# EAGLE board schema (EAGLE 9.2.2)
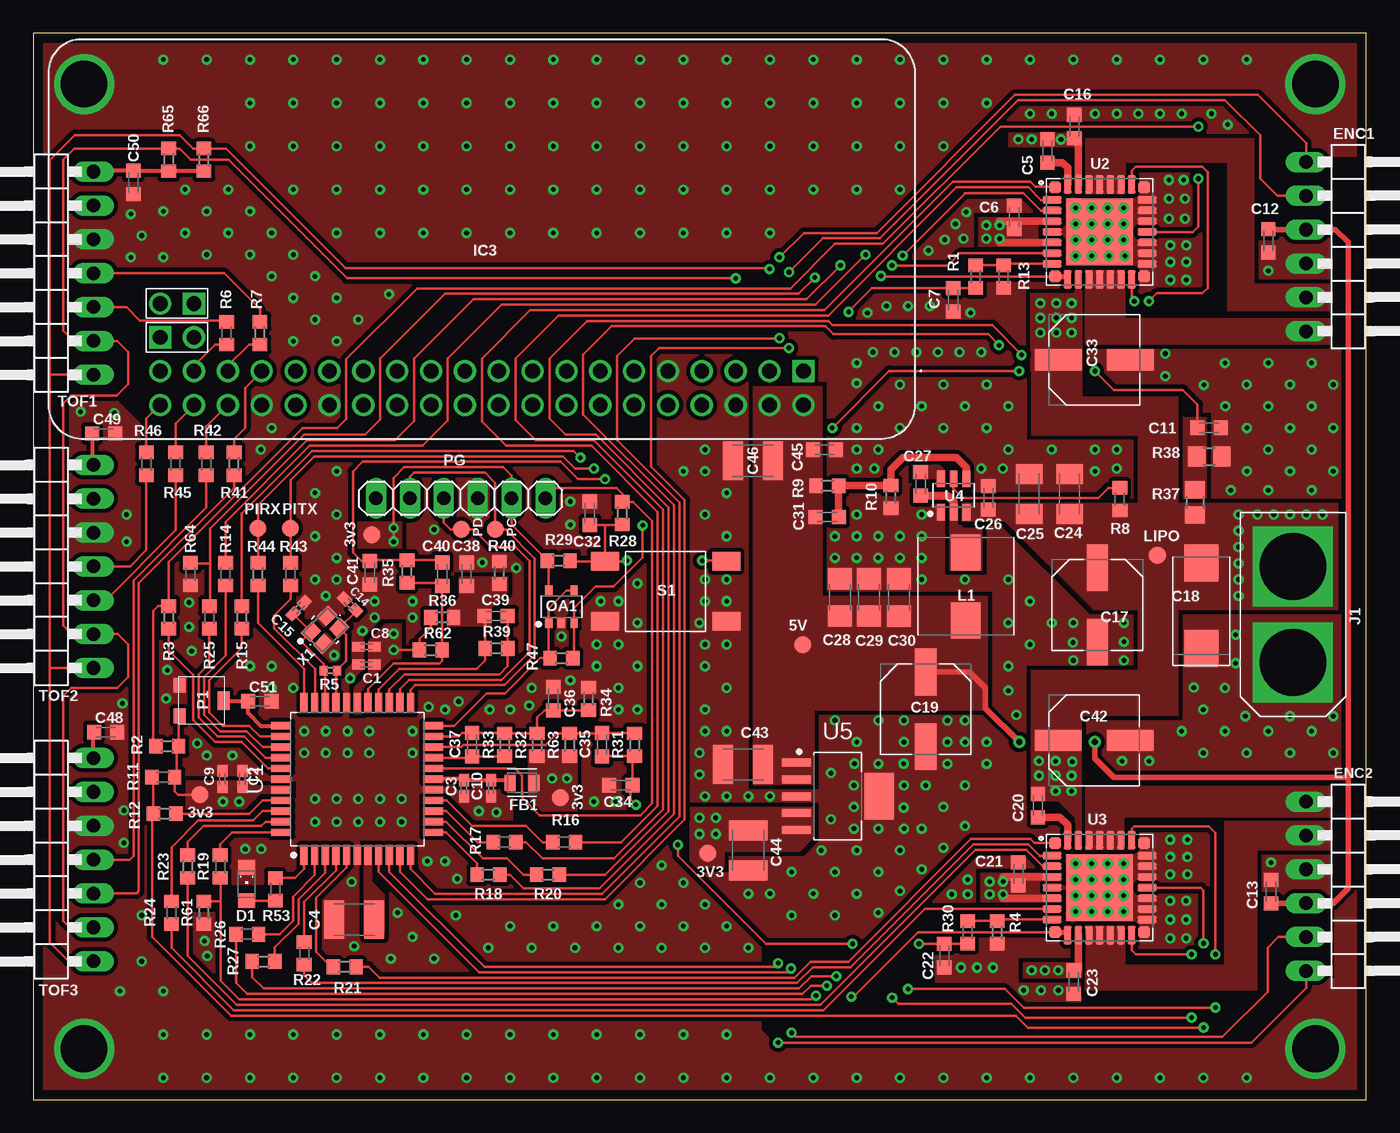
[diagram p0: board, top side]
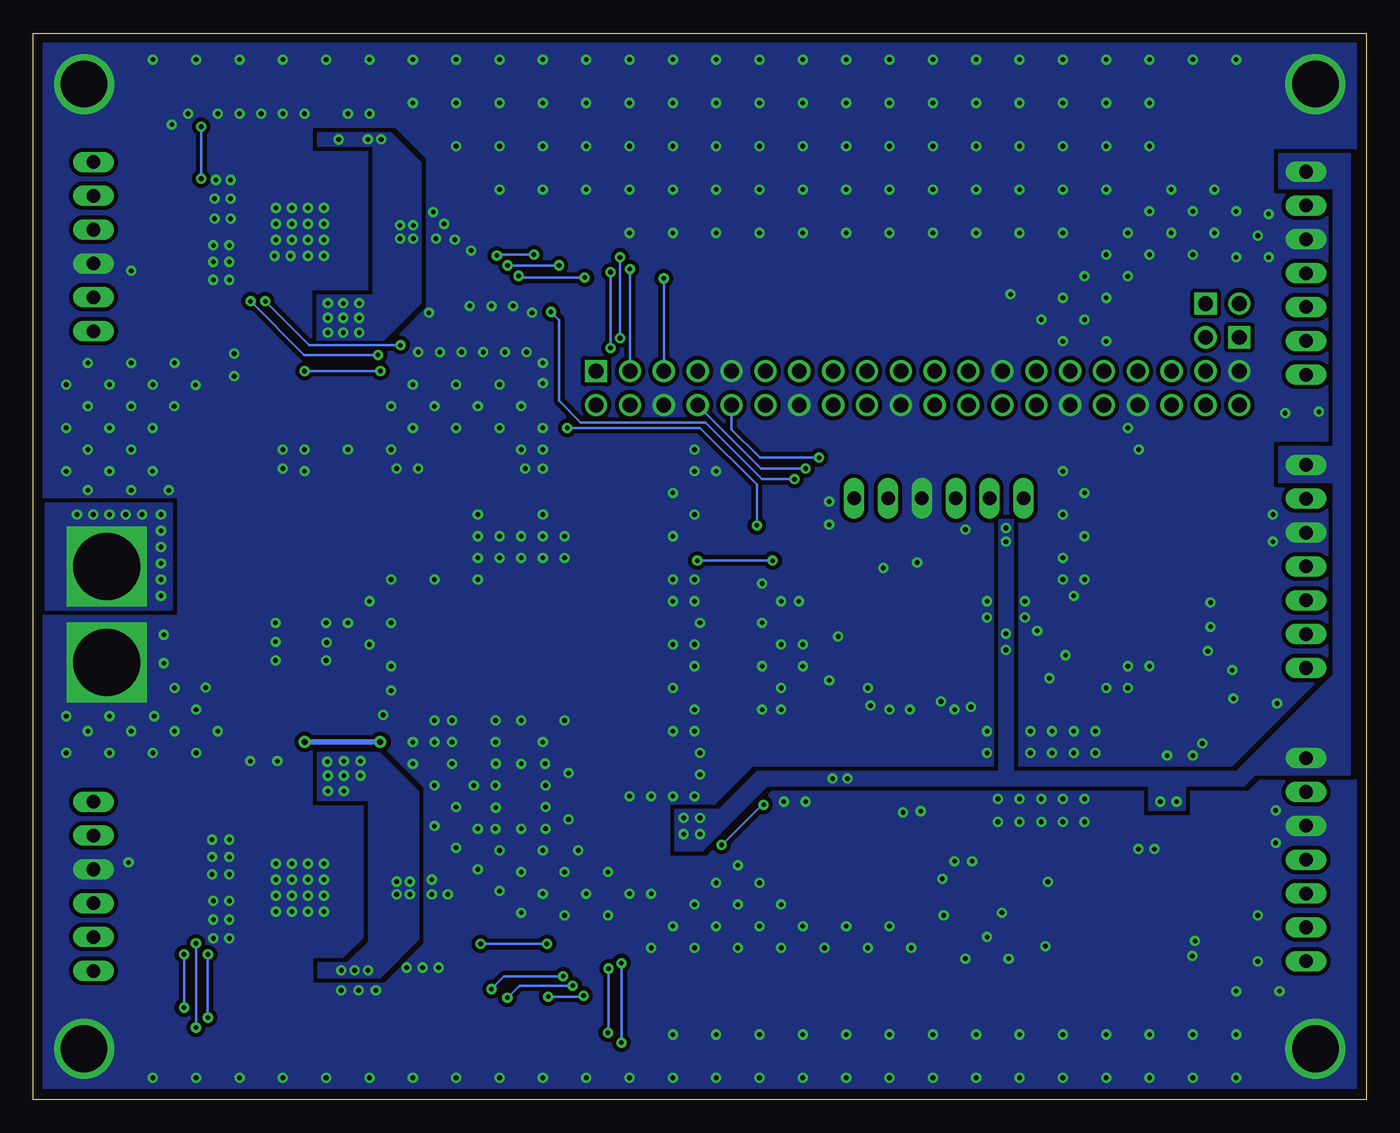
[diagram p1: board, bottom side, seen from below]

Size 100 x 80 mm. Coordinates in mm from the lower left corner, seen from the top.
Outline: 0,0 100,0 100,80 0,80 0,0
Copper layers (1*16): Top 0.0356mm / dielectric 1.5011mm / Bottom 0.0356mm
Design rules "InGear *": minimum track width 8mil, minimum drill 0.3mm, track to track 8mil, track to pad 8mil, pad to pad 8mil, via to via 8mil, smd to smd 8mil, copper to edge 15mil, drill to drill 15mil, minimum pad ring 8mil, minimum via ring 8mil, stop-mask expansion 4mil, vias tented up to drill 18mil, thermal gap 8mil

## Footprints (pad centres in the part's own frame; a part is rotated, then mirrored left to right if it is on the bottom)
B1,27 = smd 1.27 x 1.27: TP 0,0
C0402K = smd 0.925 x 0.74: 1 -0.6,0; 2 0.6,0
C1210K = smd 1.5 x 2.9: 1 -1.5,0; 2 1.5,0
C0603K = smd 1.05 x 1.08: 1 -0.875,0; 2 0.875,0
CAPMP7141X430 = smd 2.77 x 2.55: 1 -3.22,0; 2 3.22,0
CAPAE660X770 = smd 3.5 x 1.6: 1 -2.8,0; 2 2.8,0
C1206K = smd 1.5 x 2: 1 -1.5,0; 2 1.5,0
C1206 = smd 1.6 x 1.8: 1 -1.4,0; 2 1.4,0
CAPAE660X800 = smd 3.512 x 1.579: 1 -2.7,0; 2 2.7,0
LEDC2012X80 = smd 1.1 x 1.25: 1 -1.25,0; 2 1.25,0
1X06/90 = drill 1.016 long: 1 -6.35,-3.81; 2 -3.81,-3.81; 3 -1.27,-3.81; 4 1.27,-3.81; 5 3.81,-3.81; 6 6.35,-3.81
BEADC2012X105 = smd 0.8 x 1.2: 1 -0.9,0; 2 0.9,0
PI_0_W = drill 1.11 pad 1.665 square: 1 -23.885,9.92; 41 24.375,7.38; 43 21.835,4.84 | drill 1.11 pad 1.665: 2 -23.885,12.46; 3 -21.345,9.92; 4 -21.345,12.46; 5 -18.805,9.92; 6 -18.805,12.46; 7 -16.265,9.92; 8 -16.265,12.46; 9 -13.725,9.92; 10 -13.725,12.46; 11 -11.185,9.92; 12 -11.185,12.46; 13 -8.645,9.92; 14 -8.645,12.46; 15 -6.105,9.92; 16 -6.105,12.46; 17 -3.565,9.92; 18 -3.565,12.46; 19 -1.025,9.92; 20 -1.025,12.46; 21 1.515,9.92; 22 1.515,12.46; 23 4.055,9.92; 24 4.055,12.46; 25 6.595,9.92; 26 6.595,12.46; 27 9.135,9.92; 28 9.135,12.46; 29 11.675,9.92; 30 11.675,12.46; 31 14.215,9.92; 32 14.215,12.46; 33 16.755,9.92; 34 16.755,12.46; 35 19.295,9.92; 36 19.295,12.46; 37 21.835,9.92; 38 21.835,12.46; 39 24.375,9.92; 40 24.375,12.46; 42 21.835,7.38; 44 24.375,4.84
XT60 = drill 5 square: 1 -3.6,0; 2 3.6,0
INDDFN700X690X400-2 = smd 2.7 x 2.2: 1 -2.55,0; 2 2.55,0
SOT95P285X115-5 = smd 0.8 x 0.55: 1 -1.2,0.95; 2 -1.2,0; 3 -1.2,-0.95; 4 1.2,-0.95; 5 1.2,0.95
PVG3A = smd 1.1 x 0.9: 1 1.15,-1.65; 3 -1.15,-1.65 | smd 1.4 x 0.9: 2 0,1.65
1X06 = drill 1.016 long: 1 -6.35,0; 2 -3.81,0; 3 -1.27,0; 4 1.27,0; 5 3.81,0; 6 6.35,0
R0603 = smd 1 x 1.1: 1 -0.85,0; 2 0.85,0
R0402 = smd 0.6 x 0.7: 1 -0.5,0; 2 0.5,0
R0805 = smd 1.3 x 1.5: 1 -0.95,0; 2 0.95,0
BUTON_SMD = smd 2.1 x 1.4: 1 -4.55,2.25; 2 4.55,2.25; 3 -4.55,-2.25; 4 4.55,-2.25
1X07/90 = drill 1.016 long: 1 -7.62,-3.81; 2 -5.08,-3.81; 3 -2.54,-3.81; 4 0,-3.81; 5 2.54,-3.81; 6 5.08,-3.81; 7 7.62,-3.81
QFP80P1200X1200X120-44 = smd 1.5 x 0.55: 1 -5.7,4; 2 -5.7,3.2; 3 -5.7,2.4; 4 -5.7,1.6; 5 -5.7,0.8; 6 -5.7,0; 7 -5.7,-0.8; 8 -5.7,-1.6; 9 -5.7,-2.4; 10 -5.7,-3.2; 11 -5.7,-4; 23 5.7,-4; 24 5.7,-3.2; 25 5.7,-2.4; 26 5.7,-1.6; 27 5.7,-0.8; 28 5.7,0; 29 5.7,0.8; 30 5.7,1.6; 31 5.7,2.4; 32 5.7,3.2; 33 5.7,4 | smd 0.55 x 1.5: 12 -4,-5.7; 13 -3.2,-5.7; 14 -2.4,-5.7; 15 -1.6,-5.7; 16 -0.8,-5.7; 17 0,-5.7; 18 0.8,-5.7; 19 1.6,-5.7; 20 2.4,-5.7; 21 3.2,-5.7; 22 4,-5.7; 34 4,5.7; 35 3.2,5.7; 36 2.4,5.7; 37 1.6,5.7; 38 0.8,5.7; 39 0,5.7; 40 -0.8,5.7; 41 -1.6,5.7; 42 -2.4,5.7; 43 -3.2,5.7; 44 -4,5.7
QFN80P800X800X220-33N = smd 0.9 x 0.9: 1 -3.35,3.35; 9 -3.35,-3.35; 17 3.35,-3.35; 25 3.35,3.35 | smd 1.41 x 0.56: 2 -3.56,2.4; 3 -3.56,1.6; 4 -3.56,0.8; 5 -3.56,0; 6 -3.56,-0.8; 7 -3.56,-1.6; 8 -3.56,-2.4; 18 3.56,-2.4; 19 3.56,-1.6; 20 3.56,-0.8; 21 3.56,0; 22 3.56,0.8; 23 3.56,1.6; 24 3.56,2.4 | smd 0.56 x 1.41: 10 -2.4,-3.56; 11 -1.6,-3.56; 12 -0.8,-3.56; 13 0,-3.56; 14 0.8,-3.56; 15 1.6,-3.56; 16 2.4,-3.56; 26 2.4,3.56; 27 1.6,3.56; 28 0.8,3.56; 29 0,3.56; 30 -0.8,3.56; 31 -1.6,3.56; 32 -2.4,3.56 | smd 5 x 5: 33 0,0
SOT95P280X110-6 = smd 1.25 x 0.589: 1 -1.256,0.95; 2 -1.256,0; 3 -1.256,-0.95; 4 1.256,-0.95; 5 1.256,0; 6 1.256,0.95
SOT127P706X180-6 = smd 2.2 x 0.6: 1 -3.1,2.54; 2 -3.1,1.27; 3 -3.1,0; 4 -3.1,-1.27; 5 -3.1,-2.54 | smd 2.2 x 3.5: 6 3.1,0
HOLE_3.5MM = drill 3.5: P$1 0,0
OSCCC250X200X60 = smd 1.2 x 1: 1 -0.85,0.65; 2 0.85,0.65; 3 0.85,-0.65; 4 -0.85,-0.65

## Placement (x,y rotation side)
3V3  TPB1,27  [B1,27]  50.6,18.49 0 top
3V3@2  TPB1,27  [B1,27]  39.52,22.66 0 top
3V3@3  TPB1,27  [B1,27]  25.4,42.37 0 top
3V3@4  TPB1,27  [B1,27]  12.5,22.86 0 top
5V  TPB1,27  [B1,27]  57.71,34.14 0 top
C1  0.1uF  [C0402K]  25,32.64 0 top
C2  0.1uF  [C0402K]  15.7,24.05 90 top
C3  0.1uF  [C0402K]  32.31,23.37 90 top
C4  10uF  [C1210K]  24.08,13.5 0 top
C5  33nF  [C0603K]  76.08,71.19 90 top
C6  0.1uF  [C0603K]  73.6,66.2 270 top
C7  0.47uF  [C0603K]  69,60 270 top
C8  1nF  [C0402K]  25,33.98 0 top
C9  1nF  [C0402K]  14.2,24.05 90 top
C10  1nF  [C0402K]  34.34,23.37 90 top
C11  0.1uF  [C0603K]  88.22,50.4 0 top
C12  0.1uF  [C0603K]  92.66,64.41 90 top
C13  0.1uF  [C0603K]  92.87,15.61 270 top
C14  8pF  [C0402K]  23.78,37.13 315 top
C15  8pF  [C0402K]  19.91,36.86 45 top
C16  1uF  [C0603K]  78.1,73 90 top
C17  100uF  [CAPMP7141X430]  87.63,37.05 90 top
C18  100uF  [CAPAE660X770]  79.83,37.11 270 top
C19  100uF  [CAPAE660X770]  66.94,29.28 270 top
C20  33nF  [C0603K]  75.37,22.05 90 top
C21  0.1uF  [C0603K]  73.9,16.93 270 top
C22  0.47uF  [C0603K]  68.35,10.8 270 top
C23  1uF  [C0603K]  78.04,8.82 270 top
C24  10uF  [C1206K]  77.74,45.45 90 top
C25  10uF  [C1206K]  74.7,45.45 90 top
C26  0.1uF  [C0603K]  71.65,45.15 90 top
C27  0.1uF  [C0603K]  66.58,46.19 90 top
C28  22uF  [C1206]  60.53,37.69 90 top
C29  22uF  [C1206]  62.71,37.68 90 top
C30  DNP  [C1206]  64.95,37.67 90 top
C31  DNP  [C0603K]  59.56,43.71 0 top
C32  1nF  [C0603K]  41.76,43.99 90 top
C33  100uF  [CAPAE660X800]  79.6,55.5 0 top
C34  DNP  [C0603K]  44.09,23.58 180 top
C35  DNP  [C0603K]  42.67,26.62 90 top
C36  DNP  [C0603K]  39.01,30.07 90 top
C37  100pF  [C0603K]  32.92,26.62 90 top
C38  DNP  [C0603K]  32.51,39.42 90 top
C39  100pF  [C0603K]  34.72,36.28 180 top
C40  DNP  [C0603K]  30.68,39.42 270 top
C41  DNP  [C0603K]  25.26,39.52 270 top
C42  100uF  [CAPAE660X800]  79.59,26.94 0 top
C43  10uF  [C1210K]  53.25,25.15 0 top
C44  10uF  [C1210K]  53.64,18.71 270 top
C45  0.1uF  [C0603K]  59.36,48.75 180 top
C46  10uF  [C1210K]  53.99,47.93 180 top
C48  0.1uF  [C0603K]  5.44,27.57 0 top
C49  0.1uF  [C0603K]  5.28,49.97 0 top
C50  0.1uF  [C0603K]  7.5,68.8 270 top
C51  0.1uF  [C0603K]  16.99,29.88 0 top
D1  [LEDC2012X80]  16,16.18 270 top
ENC1  2283  [1X06/90]  99.3,64 270 top
ENC2  2283  [1X06/90]  99.3,16 270 top
FB1  [BEADC2012X105]  36.67,23.77 180 top
IC3  [PI_0_W]  33.89,64.57 180 top
J1  [XT60]  94.5,36.4 270 top
L1  3.3uH  [INDDFN700X690X400-2]  69.95,38.51 270 top
LIPO  TPB1,27  [B1,27]  84.33,40.84 0 top
OA1  [SOT95P285X115-5]  39.62,36.98 90 top
P1  [PVG3A]  12.62,29.93 270 top
PC  TPB1,27  [B1,27]  34.65,42.77 0 top
PD  TPB1,27  [B1,27]  32.11,42.77 0 top
PG  PICkit3  [1X06]  32.07,45.11 180 top
PIRX  TPB1,27  [B1,27]  16.87,42.88 0 top
PITX  TPB1,27  [B1,27]  19.3,42.88 0 top
R1  1k  [R0603]  70.7,61.75 90 top
R2  10k  [R0603]  10.06,26.52 0 top
R3  330  [R0603]  10.16,36.17 90 top
R4  220  [R0603]  72.3,12.55 90 top
R5  DNP  [R0402]  22.29,32.18 180 top
R6  100  [R0603]  14.5,57.5 90 top
R7  100  [R0603]  17,57.5 90 top
R8  10k  [R0603]  81.51,45.05 270 top
R9  54k9  [R0603]  59.57,46.05 180 top
R10  10k  [R0603]  64.34,45.22 90 top
R11  10k  [R0603]  9.75,24.18 0 top
R12  330  [R0603]  9.86,21.44 180 top
R13  220  [R0603]  72.8,61.75 90 top
R14  330  [R0603]  14.43,39.42 90 top
R15  330  [R0603]  15.65,36.17 270 top
R16  330  [R0603]  39.83,19.3 180 top
R17  330  [R0603]  35.36,19.3 180 top
R18  330  [R0603]  34.14,16.87 0 top
R19  330  [R0603]  14.02,17.48 270 top
R20  330  [R0603]  38.61,16.87 180 top
R21  330  [R0603]  23.37,9.96 0 top
R22  330  [R0603]  20.32,10.97 270 top
R23  330  [R0603]  11.58,17.48 270 top
R24  330  [R0603]  10.36,14.02 270 top
R25  330  [R0603]  13.21,36.17 90 top
R26  330  [R0603]  16.05,12.4 180 top
R27  330  [R0603]  17.27,10.36 0 top
R28  100  [R0603]  44.2,43.99 90 top
R29  10k  [R0603]  39.42,40.44 0 top
R30  1k  [R0603]  70.1,12.55 90 top
R31  1k  [R0603]  45.11,26.62 90 top
R32  DNP  [R0603]  37.8,26.62 90 top
R33  4k3  [R0603]  35.36,26.62 270 top
R34  4k3  [R0603]  41.66,30.07 270 top
R35  1k  [R0603]  28.04,39.62 270 top
R36  DNP  [R0603]  30.68,36.17 0 top
R37  2M  [R0805]  87.16,44.81 270 top
R38  1M  [R0805]  88.22,48.26 0 top
R39  4k3  [R0603]  34.75,33.85 0 top
R40  4k3  [R0603]  34.95,39.52 270 top
R41  100  [R0603]  15.07,47.7 270 top
R42  100  [R0603]  12.97,47.7 270 top
R43  330  [R0603]  19.3,39.42 90 top
R44  330  [R0603]  16.87,39.42 90 top
R45  100  [R0603]  10.68,47.7 270 top
R46  100  [R0603]  8.48,47.7 270 top
R47  DNP  [R0603]  39.62,33.12 0 top
R53  240  [R0603]  18.16,15.78 90 top
R61  DNP  [R0603]  12.8,14.02 90 top
R62  DNP  [R0603]  29.82,33.73 180 top
R63  DNP  [R0603]  40.23,26.62 270 top
R64  DNP  [R0603]  11.79,39.42 90 top
R65  4k7  [R0603]  10.16,70.51 270 top
R66  4k7  [R0603]  12.8,70.51 270 top
S1  [BUTON_SMD]  47.44,38.13 180 top
TOF1  VL53L0X  [1X07/90]  0.7,62 90 top
TOF2  VL53L0X  [1X07/90]  0.7,40 90 top
TOF3  VL53L0X  [1X07/90]  0.7,18 90 top
U1  DSPIC33EP128GM304TFQP44_WITH3D  [QFP80P1200X1200X120-44]  24.3,24.05 90 top
U2  [QFN80P800X800X220-33N]  80,65.1 0 top
U3  [QFN80P800X800X220-33N]  80,15.9 0 top
U4  [SOT95P280X110-6]  69.05,45.33 90 top
U5  TL1963A-33DCQRDCQ  [SOT127P706X180-6]  60.35,22.76 0 top
U$1  MOUNTING_HOLE  [HOLE_3.5MM]  3.81,76.19 0 top
U$2  MOUNTING_HOLE  [HOLE_3.5MM]  3.81,3.81 0 top
U$3  MOUNTING_HOLE  [HOLE_3.5MM]  96.19,3.81 0 top
U$4  MOUNTING_HOLE  [HOLE_3.5MM]  96.19,76.19 0 top
X1  [OSCCC250X200X60]  21.9,35.24 45 top

## Library data of the parts
3V3 3V3@2-3V3@4 5V LIPO PC PD PIRX PITX = testpad
C1-C3 = rcl; MANUFACTURER_PART_NUMBER: CC0402KRX7R7BB104; SPICEPREFIX: C
C4 C46 = rcl; MANUFACTURER_PART_NUMBER: TAJB106K016TNJ; SPICEPREFIX: C
C5 C20 = rcl; MANUFACTURER_PART_NUMBER: CC0603KRX7R9BB333; SPICEPREFIX: C
C6 C11-C13 C21 C26 C27 C45 C48-C51 = rcl; MANUFACTURER_PART_NUMBER: CC0603KRX7R9BB104; SPICEPREFIX: C
C7 C22 = rcl; MANUFACTURER_PART_NUMBER: TMK107B7474KA-TR; SPICEPREFIX: C
C8-C10 = rcl; MANUFACTURER_PART_NUMBER: AC0402KRX7R7BB102; SPICEPREFIX: C
C14 C15 = rcl; MANUFACTURER_PART_NUMBER: GCM1555C1H8R0DA16D; SPICEPREFIX: C
C16 C23 = rcl; MANUFACTURER_PART_NUMBER: UMK107AB7105KA-T; SPICEPREFIX: C
C17 = licenta; DATASHEET_URL: https://ro.mouser.com/datasheet/2/212/KEM_T2005_T491-1093550.pdf; MANUFACTURER_NAME: KEMET; MANUFACTURER_PART_NUMBER: T491X107M025AT
C18 C19 = licenta; DATASHEET_URL: https://ro.mouser.com/datasheet/2/445/865080545012-1075142.pdf; MANUFACTURER_NAME: Wurth Electronics; MANUFACTURER_PART_NUMBER: 865080545012
C24 C25 = rcl; MANUFACTURER_PART_NUMBER: GMK316AB7106KL-TR; SPICEPREFIX: C
C28 C29 = rcl; MANUFACTURER_PART_NUMBER: EMK316BB7226ML-T; SPICEPREFIX: C
C30 C31 C34-C36 C38 C40 C41 = rcl; SPICEPREFIX: C
C32 = rcl; MANUFACTURER_PART_NUMBER: 885012206083; SPICEPREFIX: C
C33 C42 = licenta; DATASHEET_URL: https://ro.mouser.com/datasheet/2/315/ABA0000C1221-1280637.pdf; MANUFACTURER_NAME: Panasonic; MANUFACTURER_PART_NUMBER: EEH-ZA1E101XV
C37 C39 = rcl; MANUFACTURER_PART_NUMBER: 885342206001; SPICEPREFIX: C
C43 C44 = rcl; MANUFACTURER_PART_NUMBER: GRM32DR71E106MA12L; SPICEPREFIX: C
D1 = licenta; DATASHEET_URL: https://ro.mouser.com/datasheet/2/239/Lite-On-LTST-C171GKT-1175279.pdf; MANUFACTURER_NAME: Lite-On; MANUFACTURER_PART_NUMBER: LTST-C171GKT
ENC1 ENC2 PG TOF1-TOF3 = pinhead
FB1 = licenta; DATASHEET_URL: https://ro.mouser.com/datasheet/2/400/eads_automotive_power_mpz2012-j_en-1221219.pdf; MANUFACTURER_NAME: TDK; MANUFACTURER_PART_NUMBER: MPZ2012S102JTD25
IC3 = Raspberry_Pi_Zero_W_(v1.3)
J1 = licenta; DATASHEET_URL: -; MANUFACTURER_NAME: SparkFun; MANUFACTURER_PART_NUMBER: PRT-10474
L1 = licenta; DATASHEET_URL: https://ro.mouser.com/datasheet/2/445/744311330-538550.pdf; MANUFACTURER_NAME: Wurth Electronics; MANUFACTURER_PART_NUMBER: 744311330
OA1 = licenta; DATASHEET_URL: https://ro.mouser.com/datasheet/2/115/TLV27x-335372.pdf; MANUFACTURER_NAME: Diodes Incorporated; MANUFACTURER_PART_NUMBER: TLV271CW5-7
P1 = licenta; DATASHEET_URL: https://ro.mouser.com/datasheet/2/54/vg3-1084610.pdf; MANUFACTURER_NAME: Bourns; MANUFACTURER_PART_NUMBER: PVG3A203C01R00
R1 R30 R31 R35 = rcl; MANUFACTURER_PART_NUMBER: ERJ-3RBD102V; SPICEPREFIX: R
R2 R8 R10 R11 R29 = rcl; MANUFACTURER_PART_NUMBER: ERJ-3RBD1002V; SPICEPREFIX: R
R3 R12 R14-R27 R43 R44 = rcl; MANUFACTURER_PART_NUMBER: RC0603FR-07330RL; SPICEPREFIX: R
R4 R13 = rcl; MANUFACTURER_PART_NUMBER: UCR03EVPFLR220; SPICEPREFIX: R
R5 R32 R36 R47 R61-R64 = rcl; SPICEPREFIX: R
R6 R7 R28 R41 R42 R45 R46 = rcl; MANUFACTURER_PART_NUMBER: AC0603FR-13100RL; SPICEPREFIX: R
R9 = rcl; MANUFACTURER_PART_NUMBER: ERJ-PB3B5492V; SPICEPREFIX: R
R33 R34 R39 R40 = rcl; MANUFACTURER_PART_NUMBER: AC0603FR-074K3L; SPICEPREFIX: R
R37 = rcl; MANUFACTURER_PART_NUMBER: ERJ-6RED2003V; SPICEPREFIX: R
R38 = rcl; MANUFACTURER_PART_NUMBER: AC0805FR-13100KL; SPICEPREFIX: R
R53 = rcl; MANUFACTURER_PART_NUMBER: ERJ-3RBD2400V; SPICEPREFIX: R
R65 R66 = rcl; MANUFACTURER_PART_NUMBER: SFR03EZPF4701; SPICEPREFIX: R
S1 = licenta; DATASHEET_URL: https://ro.mouser.com/datasheet/2/140/P090002-267756.pdf; MANUFACTURER_NAME: E-Switch; MANUFACTURER_PART_NUMBER: LL3301NF065QG
U1 = licenta; DATASHEET_URL: http://ww1.microchip.com/downloads/en/DeviceDoc/70000689d.pdf; MANUFACTURER_NAME: Microchip Technology; MANUFACTURER_PART_NUMBER: dsPIC33EP128GM304-E/PT
U2 U3 = licenta; DATASHEET_URL: https://www.nxp.com/docs/en/data-sheet/MC33926.pdf; MANUFACTURER_NAME: NXP / Freescale; MANUFACTURER_PART_NUMBER: MC33926PNB
U4 = licenta; DATASHEET_URL: http://www.ti.com/lit/ds/symlink/tps565201.pdf; MANUFACTURER_NAME: Texas Instruments; MANUFACTURER_PART_NUMBER: TPS565201DDCT
U5 = licenta; DATASHEET_URL: http://www.ti.com/lit/ds/symlink/tl1963a.pdf; MANUFACTURER_NAME: Texas Instruments; MANUFACTURER_PART_NUMBER: TL1963A-33DCQR
U$1-U$4 = licenta
X1 = licenta; DATASHEET_URL: https://ro.mouser.com/datasheet/2/122/ECX-2236-15751.pdf; MANUFACTURER_NAME: ECS; MANUFACTURER_PART_NUMBER: ECS-120-10-36-AGY-TR

## Nets
3V3: 3V3.TP 3V3@2.TP 3V3@3.TP 3V3@4.TP C1.2 C2.1 C8.2 C9.1 C44.1 C48.1 C49.1 C50.1 FB1.1 OA1.5 P1.1 PG.2 R2.2 R11.2 R29.1 R32.1 R36.1 R62.2 R63.2 R65.2 R66.2 TOF1.7 TOF2.7 TOF3.7 U1.28 U1.40 U5.4 U5.5
5V: 5V.TP C12.2 C13.2 C19.1 C28.1 C29.1 C30.1 C31.1 C43.2 C45.2 C46.1 ENC1.3 ENC2.4 IC3.2 IC3.4 L1.2 R9.2 U5.1 U5.2
!MCLR: PG.1 R28.2 U1.18
GND: C1.1 C2.2 C3.1 C4.1 C6.1 C7.2 C8.1 C9.2 C10.1 C11.2 C12.1 C13.1 C14.1 C15.2 C16.2 C17.1 C18.2 C19.2 C21.1 C22.2 C23.2 C24.2 C25.2 C26.2 C28.2 C29.2 C30.2 C32.2 C33.2 C34.2 C36.2 C38.2 C41.2 C42.2 C43.1 C44.2 C45.1 C46.2 C48.2 C49.2 C50.2 C51.2 D1.1 ENC1.4 ENC2.3 IC3.6 IC3.9 IC3.14 IC3.20 IC3.25 IC3.30 IC3.34 IC3.39 J1.2 OA1.2 P1.3 PG.3 R4.1 R10.1 R13.1 R34.1 R38.2 R40.1 R61.1 R64.1 S1.1 S1.2 TOF1.5 TOF2.5 TOF3.5 U1.6 U1.16 U1.29 U1.39 U2.5 U2.17 U2.18 U2.19 U2.20 U2.22 U2.23 U2.24 U2.25 U2.33 U3.5 U3.17 U3.18 U3.19 U3.20 U3.22 U3.23 U3.24 U3.25 U3.33 U4.1 U5.3 U5.6 U$1.P$1 U$2.P$1 U$3.P$1 U$4.P$1 X1.2 X1.4
GPIO1: R7.2 TOF1.4
GPIO2: R46.2 TOF2.4
GPIO3: R42.2 TOF3.4
LIPO: C5.2 C6.2 C16.1 C17.2 C18.1 C20.2 C21.2 C23.1 C24.1 C25.1 C26.1 C33.1 C42.1 J1.1 LIPO.TP R8.2 R37.2 U2.4 U2.6 U2.11 U2.31 U3.4 U3.6 U3.11 U3.31 U4.3
LIPO_ADC: OA1.1 OA1.4 R47.1 U1.22
M1_!D2: R18.1 U1.12
M1_!SF: R3.1 U1.38
M1_D1: R20.2 U1.13
M1_EN: R25.1 U1.37
M1_FB: C7.1 C40.1 C41.1 R1.1 R35.1
M1_IN1: R17.2 U1.14
M1_IN2: R16.2 U1.15
M1_INV: R14.1 U1.36
M1_OUT1: ENC1.6 U2.12 U2.13 U2.14 U2.15
M1_OUT2: ENC1.5 U2.27 U2.28 U2.29 U2.30
M1_QEA: ENC1.2 U1.10
M1_QEB: ENC1.1 U1.11
M1_SLEW: R15.2 U1.35
M2_!D2: R26.1 U1.2
M2_!SF: R12.1 U1.41
M2_D1: R27.2 U1.3
M2_EN: R19.1 U1.44
M2_FB: C22.1 C34.1 C35.1 R30.1 R31.1
M2_IN1: R22.1 U1.4
M2_IN2: R21.1 U1.5
M2_INV: R24.1 U1.42
M2_OUT1: ENC2.2 U3.12 U3.13 U3.14 U3.15
M2_OUT2: ENC2.1 U3.27 U3.28 U3.29 U3.30
M2_QEA: ENC2.5 U1.8
M2_QEB: ENC2.6 U1.9
M2_SLEW: R23.1 U1.43
N$1: R53.2 U1.1
N$2: IC3.33 R41.1
N$3: C27.2 U4.6
N$4: C31.2 R9.1 R10.2 U4.4
N$5: R14.2 U2.7
N$6: R21.2 U3.1
N$7: R8.1 U4.5
N$8: R22.2 U3.2
N$9: C4.2 U1.7
N$10: C27.1 L1.1 U4.2
N$11: R23.2 U3.3
N$12: R24.2 U3.7
N$13: R26.2 U3.16
N$14: R27.1 U3.26
N$15: R20.1 U2.26
N$16: R16.1 U2.1
N$17: R17.1 U2.2
N$18: R15.1 U2.3
N$19: R18.2 U2.16
N$20: R11.1 R12.2 U3.21
N$21: IC3.35 R7.1
N$22: R2.1 R3.2 U2.21
N$23: R25.2 R64.2 U2.9 U2.10
N$24: R4.2 R30.2 U3.8
N$25: C5.1 U2.32
N$26: R19.2 R61.2 U3.9 U3.10
N$27: IC3.36 R42.1
N$28: IC3.37 R6.1
N$29: IC3.38 R45.1
N$30: IC3.40 R46.1
N$31: R1.2 R13.2 U2.8
N$32: C11.1 OA1.3 R37.1 R38.1 R47.2
N$33: IC3.8 PITX.TP R43.2
N$34: IC3.10 PIRX.TP R44.2
N$36: D1.2 R53.1
N$41: C3.2 C10.2 FB1.2 U1.17
N$50: C20.1 U3.32
OA2IN+: C35.2 R31.2 R63.1 U1.20
OA2IN-: C36.1 C37.2 R32.2 R33.1 R34.2 U1.21
OA2OUT: C37.1 R33.2 U1.19
OA3IN+: C40.2 R35.2 R62.1 U1.27
OA3IN-: C38.1 C39.2 R36.2 R39.1 R40.2 U1.26
OA3OUT: C39.1 R39.2 U1.25
OSC1: C14.2 R5.1 U1.30 X1.3
OSC2: C15.1 R5.2 U1.31 X1.1
PGEC: PC.TP PG.5 U1.23
PGED: PD.TP PG.4 U1.24
PI_RX: R44.1 U1.33
PI_TX: R43.1 U1.32
POT_ADC: C51.1 P1.2 U1.34
RESET: C32.1 R28.1 R29.2 S1.3 S1.4
SCL: IC3.5 R65.1 TOF1.2 TOF2.2 TOF3.2
SDA: IC3.3 R66.1 TOF1.1 TOF2.1 TOF3.1
XSHUT1: R6.2 TOF1.3
XSHUT2: R45.2 TOF2.3
XSHUT3: R41.2 TOF3.3

## Tracks (layer width: path | path; a pad name or v marks a point on that pad's centre or on a via)
3V3  (via drill 0.35 pad 0.7)
  Top 0.203: P1.1 10.91,28.72 R2.2 10.76,26.36 10.76,24.33 R11.2 10.6,23.13 10.87,22.86 3V3@4.TP | R36.1 29.83,35.42 28.97,34.55 R62.2 | v27.03,33.73 R62.2 | R62.2 | OA1.5 38.67,40.33 R29.1 35.88,43.13 PG.2 35.88,46.83 35.26,47.45 27.82,47.45 27.02,46.65 v27.02,42.88 v27.03,42.88 v27.03,41.86
  Top 0.305: R66.2 R65.2 10.14,69.68 C50.1 4.57,69.68 TOF1.7 | C49.1 4.4,47.73 TOF2.7 | TOF3.7 4.51,27.52 C48.1
  other vias: 51.21,21.13 51.21,19.91 49.99,19.91 49.99,21.13 27.03,34.95 14.22,22.35 15.44,22.35 40.03,24.08 38.91,24.08
  pour Top (isolate 0.305, no thermals): 49.38,18.71 49.38,21.86 58.45,21.86 58.45,19.73 57.43,18.71
  pour Bottom (no thermals): 51.82,18.69 51.82,21.74 48.56,21.74 45.72,24.59 9.75,24.59 2.44,31.9 2.44,70.92 1.22,70.92 1.22,31.5 9.14,23.57 44.91,23.57 49.78,18.69
  pour Top (no thermals): 19.37,22.97 19.37,23.52 16.66,23.52 16.27,23.91 11.44,23.91 11.44,21.76 15.86,21.76 17.07,22.97
  pour Bottom (no thermals): 1.22,70.92 6.5,70.92 6.5,68.38 1.22,68.38
  pour Bottom (no thermals): 1.22,46.33 6.5,46.33 6.5,48.97 1.22,48.97
  pour Top (no thermals): 24.03,28.98 24.58,28.98 24.58,30.67 26.88,32.97 27.64,32.97 27.64,35.67 26.43,35.67 25.13,34.38 25.13,31.96 24.03,30.86
  pour Bottom: 26.52,43.48 27.53,43.48 27.53,23.57 26.52,23.57
  pour Bottom: 13.61,24.59 16.26,24.59 16.26,21.74 13.61,21.74
  pour Top (no thermals): 37.17,26.27 40.79,26.27 40.79,21.54 38.2,21.54 37.17,22.57
  pour Bottom (no thermals): 1.22,24.38 1.22,32.31 9.14,24.38
  pour Top (no thermals): 24.38,43.38 27.64,43.38 27.64,41.35 24.38,41.35
  pour Top (no thermals): 49.38,20.12 51.71,20.12 51.71,17.48 49.38,17.48
5V  (via drill 0.45 pad 0.9)
  Top 0.406: C13.2 ENC2.4 97.53,14.73 98.65,15.85 98.65,24.18 | C12.2 92.68,65.27 ENC1.3 97.7,65.27 98.65,64.32 98.65,24.18 | C19.1 70.23,32.08 71.42,30.89 71.42,29.36 v73.97,26.82 | v79.65,26.82 79.65,25.6 81.08,24.18 98.65,24.18
  Bottom 0.406: v73.97,26.82 v79.65,26.82
  pour Top (no thermals): 54.05,53.44 59.13,53.44 59.13,37.69 71.53,37.69 71.53,29.26 58.52,29.26 58.52,23.67 54.05,23.67
!MCLR
  Top 0.203: PG.1 39.17,45.87 43.76,45.87 44.2,45.42 R28.2 44.98,44.84 46.43,43.39 46.43,22.23 45.54,21.34 38,21.34 36.68,22.66 36.68,24.28 36.48,24.48 36.48,24.5 36.13,24.84 U1.18
CUTOUT_POLIGON
  cutout Top: 30.07,59.13 31.5,59.13 28.24,55.88 28.24,52.83 26.31,52.83 26.31,55.37
  cutout Top: 33.93,53.85 35.76,53.85 35.76,50.8 37.19,49.38 35.76,49.38 33.93,51.21
  cutout Top: 41.66,53.85 43.48,53.85 43.48,49.78 41.66,51.61
  cutout Top: 14.43,16.05 19.1,16.05 19.1,13.61 14.43,13.61
  cutout Top: 36.27,22.86 36.27,20.93 36.07,20.93 36.07,22.86
  cutout Top: 8.08,50.75 6.35,52.48 8.43,54.56 8.43,55.98 10.46,55.98 10.46,53.14
  cutout Top: 54.66,11.28 54.66,5.28 55.27,4.67 55.68,4.67 55.68,11.28
  cutout Top: 97.54,18.49 97.54,9.14 97.33,9.14 97.33,18.49
  cutout Top: 99.16,70.71 99.16,56.39 97.33,56.39 97.33,70.71
  cutout Top: 67.56,10.97 67.56,8.53 67.26,8.53 67.26,10.97
  cutout Top: 78.65,7.99 78.65,7.11 79.04,7.11 79.04,7.99
GND  (via drill 0.35, 0.35 pad 0.7)
  other vias: 69.6,9.9 70.8,9.9 72,9.9 74.3,8.2 75.6,8.2 76.9,8.2 85.3,19.5 86.59,19.5 85.3,16.9 85.3,18.2 86.49,12.1 85.3,12.1 85.3,14.9 85.3,13.5 86.49,13.5 78.2,17.7 79.4,17.7 80.6,17.7 81.8,17.7 81.8,16.5 78.2,16.5 81.8,14.1 78.2,14.1 80.6,14.1 79.4,14.1 78.2,15.3 81.8,15.3 80.6,15.3 79.4,15.3 79.4,16.5 80.6,16.5 70.1,16.5 68.9,15.4 70.31,59.03 86.59,18.2 24.07,11.5 14.94,25.81 70,66.6 69.18,65.7 69.79,64.6 78.2,66.9 79.4,66.9 80.6,66.9 81.8,66.9 78.2,65.7 79.4,65.7 80.6,65.7 81.8,65.7 81.8,64.5 80.6,64.5 79.4,64.5 78.2,64.5 78.2,63.3 79.4,63.3 80.7,63.3 81.9,63.3 85.2,69 86.3,69 86.4,67.6 85.2,67.6 85.2,66.1 86.4,66.1 85.3,64.1 86.5,64.1 86.5,62.85 85.3,62.85 85.3,61.5 86.5,61.5 13,25.81 70.1,15.4 6.08,51.51 6.69,29.72 86.59,16.9 86.49,14.9 15.89,18.8 17.09,18.8 12.84,11.89 13.05,10.77 23.77,31.61 24.69,35.17 40.29,44.86 40.29,43.14 33.69,40.29 36.23,39.89 40.29,31.45 25.6,37.39 28.45,37.39 25.6,36.17 28.45,36.17 11.68,37.3 11.68,35.47 10.06,32.22 9.96,30.08 22.55,33.34 30.07,42.77 9.75,78.03 13,78.03 16.26,78.03 16.26,74.78 19.51,74.78 19.51,78.03 22.76,78.03 22.76,74.78 26.01,74.78 26.01,78.03 29.26,78.03 29.26,74.78 32.51,74.78 32.51,78.03 35.76,78.03 35.76,74.78 39.01,74.78 39.01,78.03 42.27,78.03 42.27,74.78 45.52,74.78 45.52,78.03 48.77,78.03 48.77,74.78 52.02,74.78 55.27,74.78 58.52,74.78 61.77,74.78 65.02,74.78 65.02,78.03 61.77,78.03 58.52,78.03 55.27,78.03 52.02,78.03 68.28,78.03 71.53,78.03 74.78,78.03 78.03,78.03 81.28,78.03 84.53,78.03 87.78,78.03 91.03,78.03 16.26,71.53 19.51,68.28 22.76,65.02 26.01,65.02 29.26,65.02 32.51,65.02 35.76,65.02 39.01,65.02 42.27,65.02 45.52,65.02 48.77,65.02 52.02,65.02 55.27,65.02 61.77,71.53 58.52,71.53 55.27,71.53 55.27,68.28 58.52,68.28 19.51,71.53 22.76,71.53 22.76,68.28 26.01,68.28 26.01,71.53 29.26,71.53 29.26,68.28 32.51,68.28 32.51,71.53 35.76,71.53 35.76,68.28 39.01,68.28 39.01,71.53 42.27,71.53 42.27,68.28 45.52,68.28 45.52,71.53 48.77,71.53 48.77,68.28 52.02,68.28 52.02,71.53 16.26,66.65 14.63,65.02 13,66.65 11.38,65.02 16.26,63.4 19.51,63.4 21.13,61.77 19.51,60.15 22.76,60.15 24.38,58.52 22.76,56.9 19.51,56.9 21.13,58.52 13,63.4 9.75,63.2 7.32,63.2 8.13,64.82 7.32,66.45 9.75,66.65 11.38,68.28 14.63,68.28 17.88,65.02 22.76,47.14 21.13,45.52 22.76,43.89 21.13,42.27 22.76,40.64 21.13,39.01 22.76,39.01 21.95,37.8 42.27,34.14 43.89,34.14 42.27,32.51 42.57,37.39 43.89,37.39 45.32,32.51 45.32,29.26 45.32,35.76 45.32,38.71 43.89,29.26 43.89,30.89 37.39,30.89 37.19,29.56 34.24,29.26 50.39,34.14 52.02,34.14 50.39,32.51 52.02,30.89 50.39,29.26 49.99,26.01 49.99,24.38 50.39,22.76 52.02,22.76 53.64,22.76 55.27,22.76 50.39,27.64 52.02,27.64 50.39,37.39 49.99,35.76 50.39,39.01 52.02,39.01 52.02,37.39 52.02,42.27 50.39,43.89 52.02,45.52 48.77,47.14 50.39,47.14 50.39,48.77 60.15,40.64 61.77,40.64 63.4,40.64 65.02,40.64 65.02,42.27 63.4,42.27 61.77,42.27 60.15,42.27 61.77,43.89 66.65,42.27 66.65,40.64 66.65,39.01 66.65,43.89 61.77,48.77 61.77,47.34 63.1,47.34 63.4,48.77 65.63,59.54 67.26,59.54 64.01,59.54 74.78,73.96 76.4,73.96 79.65,73.96 81.28,73.96 82.91,73.96 84.53,73.96 86.16,73.96 88.39,73.96 89.61,73.15 65.02,50.39 68.28,50.39 71.53,50.39 71.12,47.35 72.75,47.35 73.15,48.77 76.4,48.77 79.65,48.77 79.65,47.14 81.28,47.34 81.28,48.77 73.15,39.01 78.03,35.76 76.4,35.76 74.78,37.39 73.15,35.76 74.78,34.14 78,34.3 73.15,32.51 73.76,28.85 28.45,27.64 28.45,26.01 25.2,26.01 25.2,27.64 23.57,27.64 23.57,26.01 21.95,26.01 21.95,27.64 20.32,27.64 20.32,26.01 21.13,22.56 22.76,22.56 24.38,22.56 26.01,22.56 27.64,22.56 27.64,20.83 26.01,20.83 24.38,20.83 22.76,20.83 21.13,20.83 30.89,29.26 29.66,29.46 19.51,30.89 17.88,30.89 17.88,32.51 16.26,32.51 30.89,17.88 31.8,16.56 29.56,17.88 30.07,10.57 26.82,10.57 28.45,12.19 27.33,14.02 31.7,13.82 35.76,13 37.39,11.38 34.14,11.38 40.64,11.38 39.01,13 42.27,13 43.89,11.38 45.52,13 47.14,14.63 48.77,16.26 50.39,14.63 52.02,13 48.77,13 47.14,11.38 50.39,11.38 53.64,11.38 69.9,39.01 45.52,16.26 43.89,14.63 47.14,17.58 53.64,15.44 55.27,15.44 56.9,17.07 58.52,15.44 59.12,18.69 60.15,17.07 61.77,15.44 61.77,18.69 63.4,17.07 63.4,14.02 60.15,13.82 56.9,13.82 65.02,18.69 66.65,20.32 63.4,20.32 61.57,20.32 59.85,21.02 61.57,21.95 59.85,24.5 61.57,23.57 60.15,28.45 61.77,26.82 63.4,25.2 61.6,25.2 65.3,25.2 65.32,26.82 65.32,28.45 63.4,28.45 65.33,23.57 65.3,21.9 66.95,23.57 68.28,21.95 69.9,20.52 68.28,18.89 66.65,17.27 65.02,15.64 69.9,23.57 68.58,25.2 68.58,26.82 68.58,28.45 69.9,28.45 69.9,26.82 71.53,26.82 71.53,25.2 90.21,34.88 90.21,32.74 87.07,30.91 89.41,30.89 87.78,29.26 90.93,28.76 94.28,28.76 97.54,28.76 95.91,27.64 92.66,27.64 89.41,27.64 86.16,27.64 81.69,25.4 83.72,25.4 87.78,26.01 91.03,26.01 94.28,26.01 97.54,26.01 92.86,17.78 92.66,62.18 84.93,54.27 89.41,55.27 91.03,53.64 92.66,55.27 94.28,53.64 95.91,55.27 97.54,53.64 89.43,52.02 92.66,52.02 95.91,52.02 91.06,50.39 92.66,48.77 91.06,47.14 94.28,47.14 97.54,47.14 97.54,50.39 94.28,50.39 95.91,48.77 9.75,4.88 9.75,8.13 6.5,8.13 9.75,1.63 13,4.88 16.26,4.88 19.51,4.88 22.76,4.88 26.01,4.88 29.26,4.88 32.51,4.88 35.76,1.63 35.76,4.88 39.01,4.88 42.27,4.88 45.52,4.88 48.77,4.88 52.02,4.88 13,1.63 16.26,1.63 19.51,1.63 22.76,1.63 26.01,1.63 29.26,1.63 32.51,1.63 39.01,1.63 42.27,1.63 45.52,1.63 48.77,1.63 52.02,1.63 55.27,1.63 58.52,1.63 61.77,1.63 65.02,1.63 68.28,1.63 71.53,1.63 74.78,1.63 78.03,1.63 81.28,1.63 84.53,1.63 87.78,1.63 91.03,1.63 71.53,53.64 73.15,52.02 69.9,52.02 68.28,53.64 66.65,52.02 65.02,53.64 63.4,52.02 61.77,50.39 61.77,53.74 61.77,55.27 62.99,56.08 17.88,50.39 17.07,48.77 12.29,26.72 39.62,34.75 42.06,22.35 43.69,22.35 33.42,21.64 34.75,21.54 23.89,16.33 17.88,61.77 35.76,29.26 31.91,29.87 7,43.89 7,41.86 6.79,21.69 6.79,19.25 8.13,10.36 8.13,13.82 11.89,33.64 3.54,51.61 73.15,30.68 62.59,59.03 64.62,56.08 66.24,56.08 67.87,56.08 69.49,56.08 71.12,56.08 61.77,68.28 65.02,68.28 65.02,71.53 68.28,71.53 68.28,74.78 71.53,74.78 67.16,63.7 68.38,64.52 87.83,53.62 84.93,55.97 81.83,35.76 81.83,34.34 26.68,60.42 78.03,32.94 81.83,32.94 92.66,45.72 95.91,45.72 89.84,45.72 65.33,20.32
  pour Top (isolate 0.305, rank 3, no thermals): 0.81,79.17 99.23,79.17 99.23,0.82 0.81,0.82
  pour Bottom (isolate 0.305, rank 3, no thermals): 0.8,79.21 99.2,79.21 99.2,0.87 0.8,0.87
GPIO1
  Top 0.203: R7.2 17,59.3 14.3,62 TOF1.4
GPIO2
  Top 0.203: R46.2 8.48,41.23 7.25,40 TOF2.4
GPIO3
  Top 0.203: R42.2 12.97,44.42 7.52,38.96 7.52,18.29 7.23,18 TOF3.4
LIPO  (via drill 0.35, 0.35 pad 0.7)
  Top 0.56: U3.11 78.4,9.7 C23.1 | U3.4 72.75,16.7 v72.75,16.35 | U3.6 72.75,15.1 v72.75,15.4 | U2.4 72.5,65.9 v72.5,65.6 | U2.6 72.5,64.3 v72.5,64.6 | U2.31 78.4,71.83 C16.1
  other vias: 76.7,24.3 77.9,23.15 77.9,24.3 77.95,25.35 76.7,25.4 75.45,25.4 75.45,24.3 76.7,23.15 71.75,16.35 71.75,15.4 76.9,9.7 74.9,9.7 75.9,9.7 75.55,59.75 75.55,57.55 76.75,57.55 77.9,57.55 75.55,58.65 76.75,58.65 77.9,58.65 77.9,59.75 76.75,59.75 71.5,65.6 71.5,64.6 73.9,72.05 77.09,72.04 74.9,72.05 96.72,43.89 95.5,43.89 94.28,43.89 93.07,43.89 91.85,43.89 90.42,43.89 90.42,42.67 90.42,41.45 90.42,40.23 90.42,39.01 90.42,37.8
  pour Top (isolate 0.254, no thermals): 69.7,44.7 69.7,43.45 72.89,43.45 79.55,36.79 97.83,36.79 97.83,44.7
  pour Top (isolate 0.305, no thermals): 78.66,18.77 78.66,27.75 74.85,27.75 74.85,22.4 76.9,22.4 78.14,21.16 78.14,18.77
  pour Bottom (isolate 0.305, no thermals): 78.65,9.15 73.95,9.15 71.05,12.05 71.05,23.09 74.01,26.05 78.7,26.05 78.7,22.45 74.89,22.45 74.89,11.81 76.45,10.25 78.65,10.25
  pour Top (isolate 0.305, no thermals): 74.3,10.25 78.65,10.25 78.65,9.15 74.3,9.15
  pour Top (isolate 0.305, no thermals): 78.66,62.22 78.66,54.65 74.85,54.65 74.85,60.5 78.14,60.5 78.14,62.22
  pour Top (no thermals): 75.4,66.15 70.9,66.15 70.9,64.05 75.4,64.05
  pour Top (isolate 0.305, no thermals): 73.2,72.6 78.66,72.6 78.66,71.5 73.2,71.5
  pour Bottom: 74.5,71.5 78.67,71.5 78.67,72.6 73.21,72.6 70.9,70.29 70.9,59.76 73.71,56.95 78.7,56.95 78.7,60.4 74.5,60.4
  pour Top (no thermals): 77.14,16.98 71.05,16.98 71.05,14.82 77.14,14.82 77.14,15.38 75.5,15.38 75.5,16.42 77.14,16.42
  pour Top (no thermals): 74.87,56.33 74.87,49.84 82.86,49.84 82.86,32.19 74.85,32.19 74.85,26.1 78.66,26.1 78.66,28.83 85.91,28.83 85.91,52.71 78.69,52.71 78.69,56.33
  pour Bottom (no thermals): 99.06,44.7 99.06,36.78 89.61,36.78 89.61,44.7
LIPO_ADC
  Top 0.203: 38.67,33.22 OA1.1 38.67,36.84 40.01,38.18 OA1.4 | 38.67,33.22 38.67,33.12 38.03,33.12 35.39,30.48 34,30.48 31.57,28.05 U1.22 | 38.67,33.22 R47.1
M1_!D2
  Top 0.203: R18.1 33.29,17.72 30.96,20.05 U1.12
M1_!SF
  Top 0.203: R3.1 10.16,33.69 11.99,31.86 11.99,28.48 13.65,26.82 15.64,26.82 17.62,24.84 U1.38
M1_D1
  Top 0.203: R20.2 36.78,16.87 35.56,18.09 33.73,18.09 30.97,20.84 U1.13
M1_EN
  Top 0.203: R25.1 13.21,32.72 12.39,31.9 12.39,28.65 13.82,27.23 15.83,27.23 17.41,25.64 U1.37
M1_FB  (via drill 0.35)
  Top 0.203: v61.16,59.1 62.94,60.88 C7.1 69.03,60.9 R1.1 | v42.89,46.55 40.86,46.55 39.56,47.85 24.71,47.85 23.98,47.12 23.98,41.05 24.63,40.4 C41.1 25.34,40.47 R35.1 30.51,40.47 C40.1
  Bottom 0.203: v61.16,59.1 60.55,58.49 60.55,52.43 58.93,50.8 49.58,50.8 45.33,46.55 v42.89,46.55
M1_IN1
  Top 0.203: R17.2 33.33,19.3 30.98,21.64 U1.14
M1_IN2
  Top 0.203: R16.2 38.2,19.3 36.98,20.52 32.92,20.52 31,22.45 U1.15
M1_INV
  Top 0.203: R14.1 14.43,33.33 12.8,31.7 12.8,28.85 14.02,27.64 16.02,27.64 17.21,26.45 U1.36
M1_OUT1
  pour Top (no thermals): 78.92,62.24 81.88,62.24 81.88,58.65 97.31,58.65 97.31,56.65 78.92,56.65
M1_OUT2
  pour Top (no thermals): 78.92,67.96 81.98,67.96 81.98,70.35 89.59,70.35 89.59,59.2 97.31,59.2 97.31,61.2 91.59,61.2 91.59,72.1 78.92,72.1
M1_QEA  (via drill 0.35)
  Top 0.203: v56.69,56.39 46.96,56.39 46.35,55.78 46.35,47.5 48.87,44.98 48.87,21.03 42.88,15.04 29.56,15.04 27.5,17.09 U1.10 | v56.69,62.08 59.23,64.62 63.5,64.62 73.86,74.98 89.41,74.98 92.05,72.34 92.05,69.09 93.33,67.81 ENC1.2
  Bottom 0.203: v56.69,62.08 v56.69,56.39
M1_QEB  (via drill 0.35)
  Top 0.203: v55.98,57.13 v55.97,57.13 55.96,57.11 45.12,57.11 43.81,55.8 43.81,49.48 48.46,44.78 48.46,21.23 42.67,15.44 30.16,15.44 28.3,17.3 U1.11 | v55.98,63.2 57.81,65.02 63.3,65.02 73.66,75.39 91.88,75.39 95.49,71.77 ENC1.1
  Bottom 0.203: v55.98,63.2 v55.98,57.13
M1_SLEW
  Top 0.203: R15.2 15.65,33.9 13.21,31.46 13.21,29.06 14.22,28.04 16.21,28.04 17.01,27.25 U1.35
M2_!D2
  Top 0.203: R26.1 18.49,12.39 19.49,13.4 19.49,15.22 21.11,16.84 U1.2
M2_!SF
  Top 0.203: R12.1 16.2,21.44 17.2,22.43 17.21,22.45 U1.41
M2_D1
  Top 0.203: R27.2 18.12,11.42 19.9,13.19 19.9,15.02 21.91,17.02 U1.3
M2_EN
  Top 0.203: R19.1 14.02,19.14 14.93,20.05 U1.44
M2_FB  (via drill 0.35)
  Top 0.203: 70.08,11.68 C22.1 v66.45,11.68 | C35.1 42.7,25.77 R31.1 44.96,25.62 C34.1 44.81,23.42 44.81,22.53 v45.21,22.12 | v61.47,11.68 54.97,11.68 48.36,18.29 v48.36,19.1
  Top 0.508: 70.08,11.68 R30.1
  Bottom 0.203: v66.45,11.68 v61.47,11.68 | v48.36,19.1 48.33,19.1 45.31,22.12 v45.21,22.12
M2_IN1
  Top 0.203: R22.1 20.32,14.81 22.7,17.2 U1.4
M2_IN2
  Top 0.203: R21.1 22.35,9.96 21.22,11.09 21.22,15.12 23.5,17.4 U1.5
M2_INV
  Top 0.203: R24.1 10.36,18.93 12.36,20.93 16.5,20.93 17.21,21.64 U1.42
M2_OUT1
  pour Top (no thermals): 78.92,13.04 81.9,13.04 81.9,10.1 89.39,10.1 89.39,20.9 97.31,20.9 97.31,18.7 91.79,18.7 91.79,8.2 78.92,8.2
M2_OUT2
  pour Top (no thermals): 78.92,18.76 81.86,18.76 81.86,21.2 97.29,21.2 97.29,23.5 78.92,23.5
M2_QEA  (via drill 0.35)
  Top 0.203: ENC2.5 93.39,12.19 92.6,11.4 92.6,8.1 89.2,4.7 57.2,4.7 v56.9,5.01 | v56.84,9.83 56.56,9.55 33.45,9.55 25.91,17.09 U1.8
  Bottom 0.203: v56.84,9.83 56.84,5.06 v56.9,5.01
M2_QEB  (via drill 0.35)
  Top 0.203: ENC2.6 95.49,8.38 91.38,4.27 v55.88,4.27 | v55.88,10.23 55.6,9.96 33.84,9.96 26.7,17.1 U1.9
  Bottom 0.203: v55.88,10.23 v55.88,4.27
M2_SLEW
  Top 0.203: R23.1 11.58,19.34 12.76,20.52 17.09,20.52 17.41,20.84 U1.43
N$1
  Top 0.203: R53.2 19.62,16.62 20.3,17.3 U1.1
N$2
  Top 0.203: IC3.33 15.88,53.4 15.88,50.38 15.07,49.57 R41.1
N$3
  pour Top (no thermals): 66.04,47.59 68.02,47.59 68.4,47.21 68.4,45.96 67.8,45.96 67.8,46.54 66.04,46.54
N$4
  Top 0.56: U4.4 70,47.44 69.27,48.16 65.23,48.16 64.34,47.27 R10.2 64.33,46.05 R9.1 60.42,43.73 C31.2
N$5  (via drill 0.35)
  Top 0.203: U2.7 69.53,63.5 68.62,62.59 v64.41,62.59 | v60.55,62.59 58.01,60.05 33.01,60.05 28.57,55.6 28.57,50.92 27.13,49.48 20.56,49.48 14.43,43.34 R14.2
  Bottom 0.203: v64.41,62.59 v60.55,62.59
N$6
  Top 0.203: U3.1 75.12,19.25 74.83,19.55 70.36,19.55 61.15,10.34 58.32,10.34 57.12,9.14 25.97,9.14 25.16,9.96 R21.2
N$7
  Top 0.203: R8.1 80.65,45.9 79.9,45.15 69.75,45.15 69.05,45.85 U4.5
N$8
  Top 0.203: U3.2 75.5,18.3 74.66,19.14 70.53,19.14 61.32,9.94 58.49,9.94 57.29,8.74 20.89,8.74 20.32,9.31 R22.2
N$9
  pour Top (no thermals): 24.83,19.11 25.38,19.11 25.38,16.36 26.33,15.41 26.33,12.46 24.83,12.46
N$10
  Top 0.6: C27.1 68.58,45.31 69.05,44.84 U4.2
  pour Top (isolate 0.254, rank 2, no thermals): 71.17,39.71 68.75,39.71 68.75,44.7 69.35,44.7 69.35,43.31 69.79,42.87 71.17,42.87
N$11
  Top 0.203: U3.3 75.72,17.5 74.49,18.74 70.69,18.74 59.07,7.11 15.24,7.11 11.58,10.77 R23.2
N$12
  Top 0.203: U3.7 66.89,14.3 59.3,6.71 15.04,6.71 10.36,11.38 R24.2
N$13  (via drill 0.35)
  Top 0.203: U3.16 82.4,11.2 82.7,10.9 v86.9,10.9 | v86.9,6.15 74.42,6.15 73.39,7.18 64.89,7.18 v64.44,7.64 | v59.53,8.54 58.33,8.54 57.71,7.92 16.05,7.92 15.2,8.78 R26.2
  Bottom 0.203: v86.9,10.9 v86.9,6.15 | v59.53,8.54 63.53,8.54 v64.44,7.64
N$14  (via drill 0.35)
  Top 0.203: U3.26 82.4,20.3 82.6,20.5 88.21,20.5 88.69,20.02 v88.69,10.9 | v88.69,6.9 74.3,6.9 72.91,8.29 v65.63,8.29 | v60.24,9.25 58.38,9.25 57.46,8.33 17.27,8.33 16.42,9.18 R27.1
  Bottom 0.203: v88.69,10.9 v88.69,6.9 | v60.24,9.25 64.66,9.25 v65.63,8.29
N$15  (via drill 0.35)
  Top 0.203: v74.14,55.87 74.14,55.91 71.94,58.12 59.94,58.12 59.64,58.42 41.55,58.42 38.72,55.59 38.72,51.09 39.93,49.88 42.2,49.88 47.65,44.43 47.65,21.61 42.91,16.87 R20.1 | U2.26 82.4,69.7 82.7,70 87.7,70 88.1,69.6 88.1,60.9 87.7,60.5 84.3,60.5 v83.7,59.9
  Bottom 0.203: v83.7,59.9 79.67,55.87 v74.14,55.87
N$16
  Top 0.203: U2.1 76.62,68.48 75.2,68.48 74.79,68.89 69.01,68.89 59.36,59.23 37.28,59.23 33.66,55.61 33.66,50.88 35.46,49.07 41.86,49.07 46.84,44.1 46.84,22.05 44.09,19.3 R16.1
N$17
  Top 0.203: U2.2 75.6,67.5 74.65,68.45 69.26,68.45 59.64,58.83 39.41,58.83 36.19,55.6 36.19,50.98 37.7,49.48 42.03,49.48 47.24,44.27 47.24,21.77 43.55,18.09 38.2,18.09 36.98,19.3 R17.1
N$18  (via drill 0.35)
  Top 0.203: U2.3 75.6,66.7 74.29,68 69.88,68 69.88,67.98 v65.22,63.33 | v62.45,63.4 58.69,59.64 35.15,59.64 31.1,55.59 31.1,50.95 29.22,49.07 20.73,49.07 15.65,43.99 R15.1
  Bottom 0.203: v62.45,63.4 65.16,63.4 v65.22,63.33
N$19  (via drill 0.35)
  Top 0.203: U2.16 82.4,60.13 82.6,59.93 v82.6,59.9 | v72.45,56.6 71.64,57.41 60.03,57.41 59.44,58.01 43.38,58.01 41.26,55.89 41.26,51.4 48.06,44.6 48.06,21.44 42.47,15.85 36.78,15.85 35.76,16.87 R18.2
  Bottom 0.203: v82.6,59.9 79.3,56.6 v72.45,56.6
N$20  (via drill 0.35)
  Top 0.203: U3.21 87.6,15.9 87.8,15.7 v87.8,11.71 | v87.8,5.4 74.6,5.4 73.7,6.3 14.83,6.3 8.91,12.22 8.91,21.35 R12.2 9.01,24.08 R11.1
  Bottom 0.203: v87.8,11.71 v87.8,5.4
N$21
  Top 0.203: IC3.35 14.6,55.06 16.19,56.65 R7.1
N$22  (via drill 0.35)
  Top 0.203: U2.21 87,65.1 87.4,65.5 v87.4,69.1 | v87.4,73 72.55,73 63.76,64.21 60.15,64.21 56.79,60.86 28.78,60.86 23.49,55.56 23.49,51.08 22.8,50.39 20.22,50.39 10.16,40.33 R3.2 9.38,37.02 9.01,36.64 9.01,26.72 R2.1
  Bottom 0.203: v87.4,73 v87.4,69.1
N$23  (via drill 0.35)
  Top 0.203: U2.9 63.65,61.75 v63.6,61.8 | v58.63,61.67 57.41,60.45 30.88,60.45 26.04,55.61 26.04,51.03 24.89,49.88 20.32,49.88 13.27,42.84 13.27,40.23 | R25.2 13.27,37.08 13.27,40.23 | R64.2 11.82,40.23 13.27,40.23
  Top 0.406: U2.9 77.39,61.75 U2.10
  Bottom 0.203: v63.6,61.8 63.48,61.67 v58.63,61.67
N$24
  Top 0.203: R30.2 R4.2 72.4,13.5 U3.8
N$25
  Top 0.56: C5.1 77.19,70.31 77.6,69.9 U2.32
N$26  (via drill 0.35)
  Top 0.203: R19.2 14.04,16.6 14.04,14.87 | 14.04,14.87 14.04,8.92 15.44,7.52 58.39,7.52 58.67,7.79 v58.73,7.79 | R61.2 14.04,14.87 | U3.9 66.35,12.55 61.52,7.72 v61.37,7.72
  Top 0.406: U3.9 77.39,12.55 U3.10
  Bottom 0.203: v58.73,7.79 58.8,7.72 v61.37,7.72
N$27
  Top 0.203: IC3.36 12.97,50.49 R42.1
N$28
  Top 0.203: IC3.37 12.05,55.06 13.65,56.65 R6.1
N$29
  Top 0.203: IC3.38 10.68,50.73 R45.1
N$30
  Top 0.203: R46.1 8.48,51.08 IC3.40
N$31
  Top 0.203: R1.2 R13.2 72.9,62.7 U2.8
N$32  (via drill 0.35)
  Top 0.203: R47.2 40.57,33.22 OA1.3 40.57,36.87 42.19,38.48 43.54,38.48 45.72,40.66 v45.72,43.08 | C11.1 87.34,52.16 86.26,53.24 81.08,53.24 v79.65,54.66 | v59.94,50.39 64.21,54.66 v73.97,54.66
  Bottom 0.203: v45.72,43.08 45.72,46.13 49.99,50.39 v59.94,50.39 | v73.97,54.66 v79.65,54.66
  pour Top (no thermals): 88.01,45.11 86.29,45.11 86.29,51.21 88.01,51.21
N$33  (via drill 0.35)
  Top 0.203: v42.06,47.35 40.64,47.35 39.73,48.26 21.09,48.26 19.3,46.48 PITX.TP R43.2
  Bottom 0.203: v42.06,47.35 45.39,47.35 IC3.8
N$34  (via drill 0.35)
  Top 0.203: v41.05,48.16 40.54,48.66 20.91,48.66 16.87,44.62 PIRX.TP R44.2
  Bottom 0.203: v41.05,48.16 45.49,48.16 47.62,50.28 IC3.10
N$36
  Top 0.203: D1.2 R53.1
N$41
  Top 0.305: FB1.2 35.58,23.97 C10.2 C3.2 32.23,24.05 U1.17
N$50
  Top 0.56: U3.32 77.6,20.6 77.03,21.17 C20.1
OA2IN+
  Top 0.203: R31.2 45.09,27.49 C35.2 42.65,27.47 R63.1 39.28,27.47 38.43,26.62 32.3,26.62 32.12,26.45 U1.20
OA2IN-
  Top 0.203: R34.2 41.63,29.2 C36.1 38.34,29.2 37.8,28.65 R32.2 R33.1 35.33,27.49 C37.2 32.17,27.49 31.92,27.25 U1.21
OA2OUT
  Top 0.203: R33.2 35.33,25.74 C37.1 32.82,25.64 U1.19
OA3IN+
  Top 0.203: R35.2 30.46,38.77 C40.2 30.68,33.75 R62.1 30.67,32.9 30.48,32.72 27.03,32.72 25.11,30.8 U1.27
OA3IN-
  Top 0.203: C39.2 33.9,36.23 R39.1 33.9,32.94 33.26,32.31 27.43,32.31 25.91,30.78 U1.26
  pour Top (no thermals): 31.03,35.52 34.37,35.52 34.37,36.87 35.62,38.13 35.62,39.22 31.9,39.22 31.9,37.59 31.03,36.72
OA3OUT
  Top 0.203: C39.1 R39.2 35.6,32.52 34.98,31.9 27.84,31.9 26.7,30.77 U1.25
OSC1
  Top 0.203: C14.2 24.2,36.62 X1.3 23.47,34.86 23.47,32.92 22.8,32.24 R5.1 22.7,32.09 U1.30
OSC2
  Top 0.203: C15.1 X1.1 20.22,34.48 20.22,34.24 21.8,32.66 R5.2 21.91,32.07 U1.31
PGEC
  Top 0.203: PG.5 28.26,46.74 28.56,47.04 33.88,47.04 34.65,46.27 PC.TP 35.46,42.77 37.62,40.61 37.62,33.35 35.36,31.09 28.65,31.09 28.3,30.74 U1.23
PGED
  Top 0.203: PG.4 30.8,43.28 31.3,42.77 PD.TP 33.02,42.77 34.34,41.45 36.17,41.45 37.22,40.41 37.22,33.57 35.15,31.5 28.21,31.5 27.5,30.79 U1.24
PI_RX
  Top 0.203: R44.1 16.87,35.76 20.32,32.31 20.32,29.76 U1.33
PI_TX
  Top 0.203: R43.1 19.3,37.55 18.09,36.34 18.09,35.36 21.13,32.31 21.13,29.77 U1.32
POT_ADC
  Top 0.305: P1.2 14.33,29.88 C51.1 16.11,29 17.07,28.05 U1.34
RESET  (via drill 0.35)
  Top 0.203: S1.3 51.94,40.44 v50.19,40.44 | S1.4 44.48,40.38 v44.53,40.44 | 42.88,43.12 C32.1 | R28.1 44.17,43.12 42.88,43.12 | S1.4 40.32,40.38 R29.2 | 42.88,43.12 42.88,40.4 S1.4
  Bottom 0.203: v44.53,40.44 v50.19,40.44
SCL  (via drill 0.35)
  Top 0.203: v52.7,61.61 23.54,61.61 14.64,70.51 11.82,70.51 10.97,71.36 R65.1 3.08,71.36 2.23,70.52 2.23,57.71 3.02,56.92 TOF1.2 6.28,56.92 7.11,56.08 7.11,53.7 6.25,52.83 2.85,52.83 2.23,52.22 2.23,35.56 2.88,34.92 TOF2.2 6.33,34.92 7.11,34.14 7.11,31.7 6.3,30.89 2.85,30.89 2.23,30.28 2.23,13.41 2.73,12.92 TOF3.2
  Bottom 0.203: IC3.5 v52.7,61.61
SDA  (via drill 0.35)
  Top 0.203: 1.23,54.4 1.23,70.48 3.11,72.37 10.98,72.37 11.99,71.36 R66.1 14.47,71.36 23.44,62.38 55.17,62.38 v55.24,62.31 | 1.23,54.4 1.23,32.4 | 1.23,32.4 1.23,11.78 2.64,10.36 2.66,10.38 TOF3.1 | TOF2.1 1.25,32.38 1.23,32.4 | TOF1.1 1.25,54.38 1.23,54.4
  Bottom 0.203: IC3.3 v55.23,62.31 v55.24,62.31
XSHUT1
  Top 0.203: R6.2 14.4,58.45 8,58.45 7,59.45 TOF1.3
XSHUT2
  Top 0.203: R45.2 10.68,42.72 5.42,37.46 TOF2.3
XSHUT3
  Top 0.203: R41.2 15.07,45.89 7.92,38.74 7.92,15.65 7.74,15.46 TOF3.3

## Text on the board
tNames: 3v3 | 3v3 | 3v3